# Allegro board HY_IP5328_TEST_V10A.brd
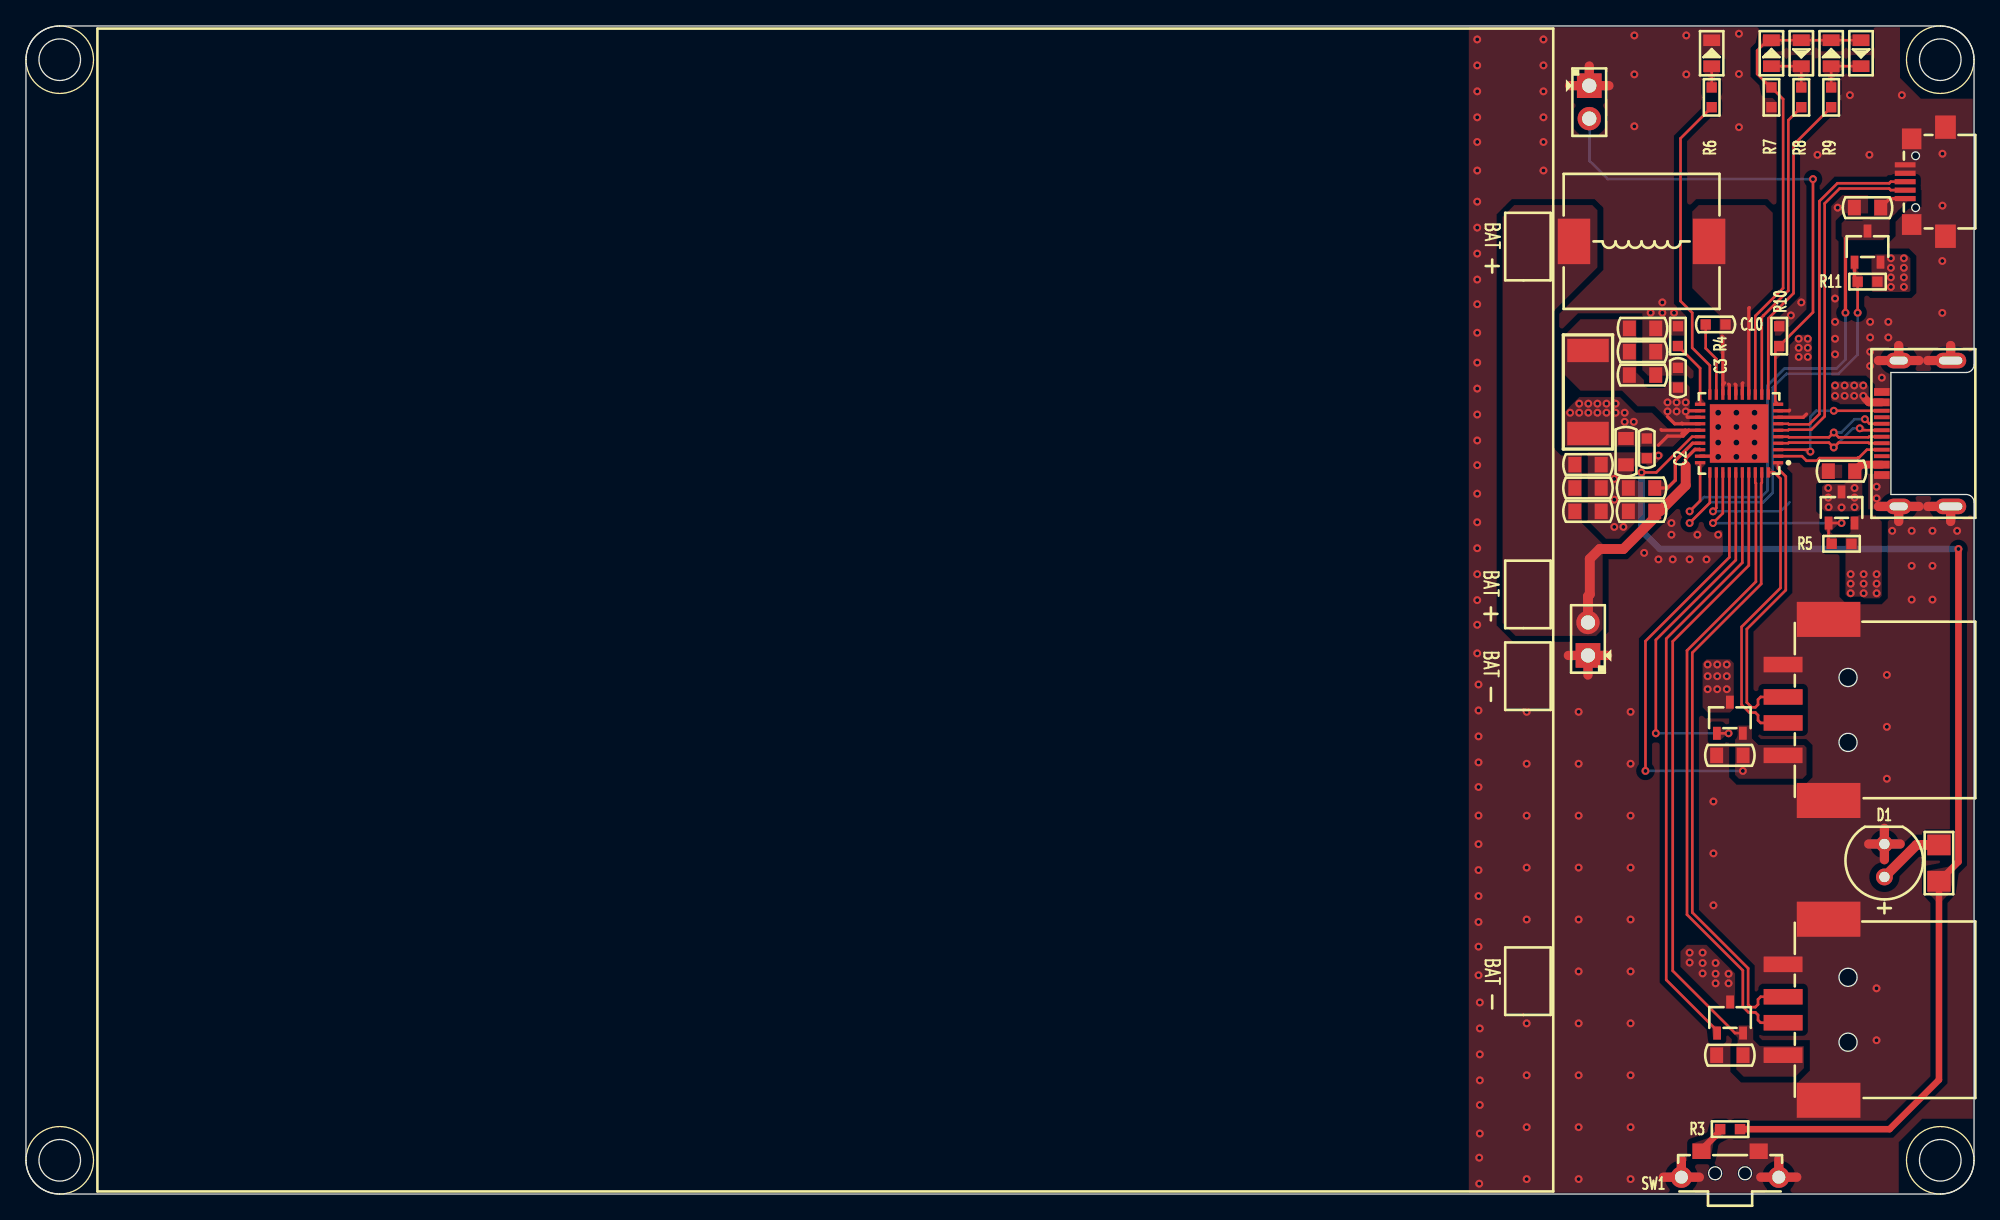
[diagram p0: board, top side]
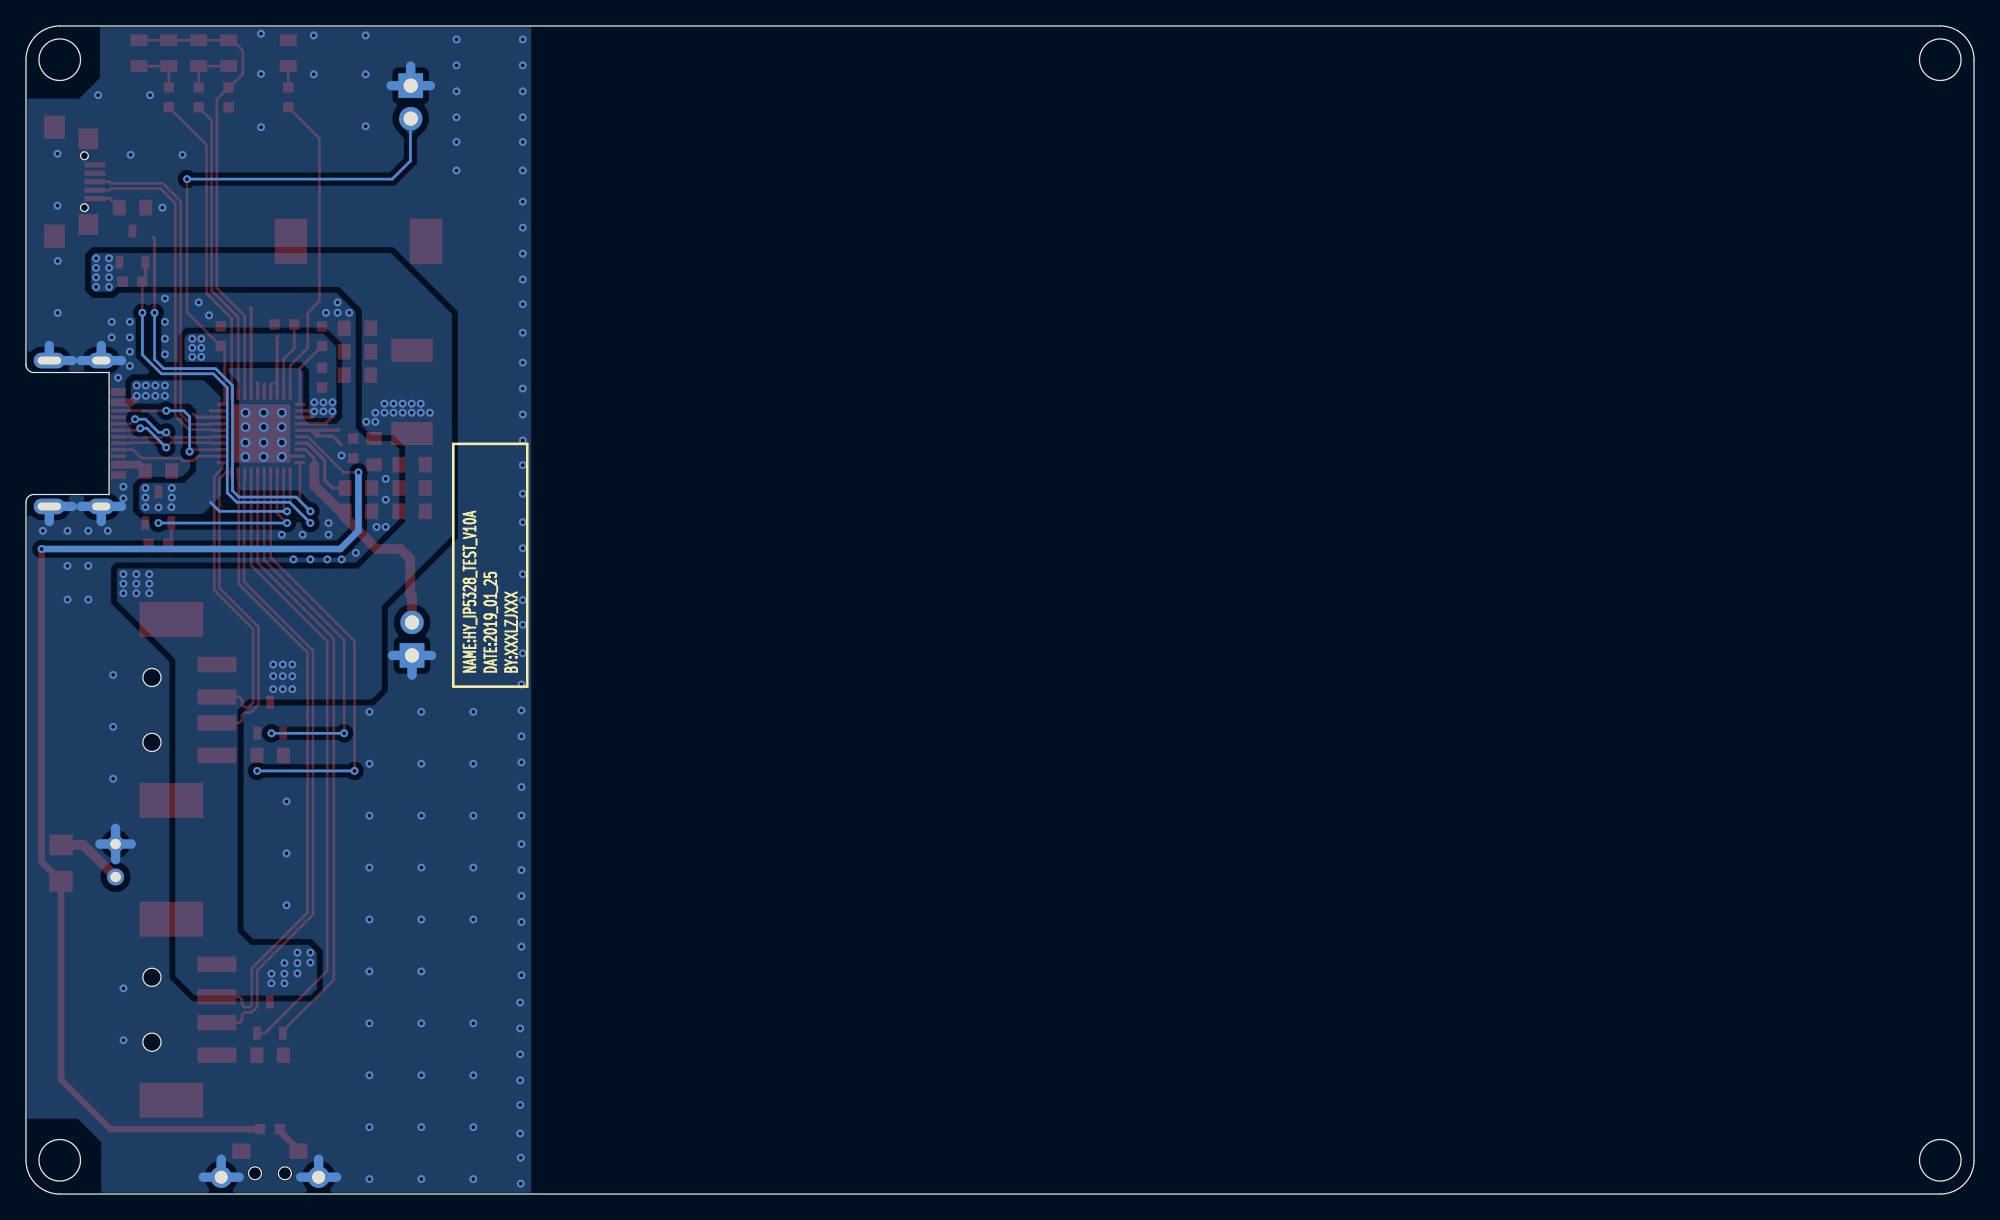
[diagram p1: board, bottom side, seen from below]

Outline 150 x 90 mm; copper layers: TOP, BOTTOM. Coordinates in mm from the lower left corner of the outline.
Outline path: circle c2.6,87.4 r1.6 ; circle c2.6,2.6 r1.6 ; circle c147.4,87.4 r1.6 ; circle c147.4,2.6 r1.6 ; 0,87.4 arc(0.76,89.24) 2.6,90 147.4,90 arc(149.24,89.24) 150,87.4 150,63.9 arc(149.82,63.48) 149.4,63.3 143.6,63.3 143.6,53.9 149.4,53.9 arc(149.82,53.72) 150,53.3 150,2.6 arc(149.24,0.76) 147.4,0 2.6,0 arc(0.76,0.76) 0,2.6 0,87.4

## Design rules (mm)
constraint set DEFAULT: min track width 0.203, pair gap 0.203
net group DP6: nets DMA1 DPA1
net group DP9: nets DMA2 DPA2
net group DP11: nets DMB DPB
net group DP12: nets DMC DPC

## Placement (name value [footprint] x y rotation side)
C1  22uF_25V  [C0805]  123.2 57.2 270 top
C2  0.1uF_25V  [C0603]  124.8 57.45 90 top
C3  0.1uF_25V  [C0603]  127.2 62.9 270 top
C4  22uF_25V  [C0805]  124.47 63.1 0 top
C5  22uF_25V  [C0805]  124.47 64.9 0 top
C6  22uF_25V  [C0805]  124.47 66.7 0 top
C7  22uF_25V  [C0805]  124.4 52.6 0 top
C8  22uF_25V  [C0805]  124.4 54.4 0 top
C9  10uF_25V  [C0805]  139.8 55.7 180 top
C10  0.1uF_25V  [C0603]  130.1 67 180 top
C11  22uF_25V  [C0805]  120.27 52.6 0 top
C12  22uF_25V  [C0805]  120.27 54.4 0 top
C13  22uF_25V  [C0805]  120.27 56.2 0 top
C14  10uF_25V  [C0805]  141.8 76 180 top
C15  10uF_25V  [C0805]  131.2 10.7 180 top
C16  10uF_25V  [C0805]  131.2 33.8 180 top
D1  LED_GREEN  [LED-5R0X5R0]  143.1 25.7 90 top
D2  LED_GREEN  [LED0805]  129.8 87.9 90 top
D3  LED_GREEN  [LED0805]  134.4 87.9 90 top
D4  LED_GREEN  [LED0805]  136.7 87.9 270 top
D5  LED_GREEN  [LED0805]  139 87.9 90 top
D6  LED_GREEN  [LED0805]  141.3 87.9 270 top
J1  -  [HEADER2X1-2R54-M]  120.27 41.5 90 top
J2  -  [HEADER2X1-2R54-M]  120.37 85.4 270 top
L1  SMMS1040-1R5M  [L10040]  124.4 73.4 180 top
NOREF  -  []  0 0 90 top
NOREF#2  -  []  0 0 0 top
Q1  AO3401A  [SOT23-3]  139.8 52.9 0 top
Q2  AO3401A  [SOT23-3]  141.8 73 0 top
Q3  AO3400A  [SOT23-3]  131.22 13.6 0 top
Q4  AO3400A  [SOT23-3]  131.2 36.7 0 top
R1  0R01  [R2512]  120.27 61.8 270 top
R2  20R  [R1206]  147.3 25.5 90 top
R3  1K  [R0603]  131.22 5 0 top
R4  110K  [R0603]  127.2 66.1 90 top
R5  10K  [R0603]  139.8 50.1 0 top
R6  10K  [R0603]  129.8 84.5 90 top
R7  0R/NI  [R0603]  134.4 84.5 270 top
R8  10K  [R0603]  136.7 84.5 90 top
R9  10K  [R0603]  139 84.5 90 top
R10  51K  [R0603]  135 66.1 90 top
R11  10K  [R0603]  141.8 70.3 0 top
SW1  K2-1112SW-A4SW-04/NI  [K2-1112SW-A4SW-04]  131.22 1.6 180 top
U1  IP5328P  [QFN40-6X6X0R5-4R6X4R6]  131.91 58.6 90 top
USB1  -  [USB-C_16P]  143 58.6 90 top
USB2  USB-MICRO  [USB-U-F-M5SS-W-1]  147.8 78 90 top
USB3  USB-A/NI  [USB-A-SMD]  136.2 14.2 0 top
USB4  USB-A/NI  [USB-A-SMD]  136.2 37.3 0 top

## Library data of the parts
C1 C4-C9 C11-C16 = CAP NP_3
C2 C3 C10 = CAP NP_2
D1-D6 = LED_2
J1 J2 = CON2
L1 = IND_BEAD_0805_600OHM_1
Q1 Q2 = MOS-P_0
Q3 Q4 = MOS-N
R1-R11 = R_Generic
SW1 = SWITCH-SPST-4P
U1 = IP5328P_0
USB1 = TYPE-C_16P
USB2 = USB-MICRO
USB3 USB4 = USB-A

## Footprints (pads in the part's own frame, mm; a bottom-side part is the same pattern mirrored in y, then rotated)
C0603
  rect 0.8x0.8 smd: 1(-0.762,0) 2(0.762,0)
C0805
  rect 1x1.2 smd: 1(-1.016,0) 2(1.016,0)
HEADER2X1-2R54-M
  rect 1.9x1.9 hole 1.1: 1(0,0)
  round 1.8 hole 1.1: 2(2.54,0)
K2-1112SW-A4SW-04
  round 1.65 hole 1: 1(-3.75,0.3) 4(3.75,0.3)
  rect 1.4x1.2 smd: 2(-2.2,-1.7) 3(2.2,-1.7)
L10040
  rect 2.5x3.5 smd: 1(-5.2,0) 2(5.2,0)
LED0805
  rect 0.9x1.3 smd: 1(-1,0) 2(1,0)
LED-5R0X5R0
  round 1.3 hole 0.8: 1(-1.27,0) 2(1.27,0)
QFN40-6X6X0R5-4R6X4R6
  rect 0.25x0.8 smd: 1(-2.25,-3) 2(-1.75,-3) 3(-1.25,-3) 4(-0.75,-3) 5(-0.25,-3) 6(0.25,-3) 7(0.75,-3) 8(1.25,-3) 9(1.75,-3) 10(2.25,-3) 21(2.25,3) 22(1.75,3) 23(1.25,3) 24(0.75,3) 25(0.25,3) 26(-0.25,3) 27(-0.75,3) 28(-1.25,3) 29(-1.75,3) 30(-2.25,3)
  rect 0.8x0.25 smd: 11(3,-2.25) 12(3,-1.75) 13(3,-1.25) 14(3,-0.75) 15(3,-0.25) 16(3,0.25) 17(3,0.75) 18(3,1.25) 19(3,1.75) 20(3,2.25) 31(-3,2.25) 32(-3,1.75) 33(-3,1.25) 34(-3,0.75) 35(-3,0.25) 36(-3,-0.25) 37(-3,-0.75) 38(-3,-1.25) 39(-3,-1.75) 40(-3,-2.25)
  rect 4.5x4.5 smd: 41(0,0)
R0603
  rect 0.8x0.8 smd: 1(-0.762,0) 2(0.762,0)
R1206
  rect 1.6x1.8 smd: 1(-1.4,0) 2(1.4,0)
R2512
  rect 1.8x3.2 smd: 1(-3.2,0) 2(3.2,0)
SOT23-3
  rect 0.6x1 smd: 1(-1,-1.2) 2(1,-1.2) 3(0,1.2)
USB-A-SMD
  rect 3x1.2 smd: 1(-0.9,-3.5) 2(-0.9,-1) 3(-0.9,1) 4(-0.9,3.5)
  rect 4.9x2.7 smd: 5(2.6,-6.975) 6(2.6,6.975)
USB-C_16P
  rect 0.6x1.2 smd: 1(-3.2,0.1) 2(-2.4,0.1) 11(2.4,0.1) 12(3.2,0.1)
  rect 0.3x1.2 smd: 3(-1.75,0.1) 4(-1.25,0.1) 5(-0.75,0.1) 6(-0.25,0.1) 7(0.25,0.1) 8(0.75,0.1) 9(1.25,0.1) 10(1.75,0.1)
  oval 1.2x2 hole 0.6x1.4: 13(-5.62,-1.2) 14(5.62,-1.2)
  oval 1.2x2.4 hole 0.6x1.8: 15(-5.62,-5.2) 16(5.62,-5.2)
USB-U-F-M5SS-W-1
  rect 0.4x1.6 smd: 1(-1.3,3.1) 2(-0.65,3.1) 3(0,3.1) 4(0.65,3.1) 5(1.3,3.1)
  rect 1.6x1.5 smd: 6(-3.3,2.6) 7(3.3,2.6)
  rect 1.8x1.6 smd: 8(-4.2,0) 9(4.2,0)

## Nets
GND: C1.2 C2.1 C3.1 C4.2 C5.2 C6.2 C7.1 C8.1 C9.2 C11.2 C12.2 C13.2 C14.2 C15.2 C16.2 D1.2(CATHODE) D2.2(CATHODE) J1.1 J2.1 R4.2 R7.2 R10.2 SW1.1 SW1.2 SW1.4 U1.29 U1.41 USB1.1 USB1.12 USB1.13 USB1.14 USB1.15 USB1.16 USB2.4 USB2.5 USB2.6 USB2.7 USB2.8 USB2.9 USB3.4 USB3.5 USB3.6 USB4.4 USB4.5 USB4.6
VBUSG: Q1.1 R5.1 U1.33
VCC_VBAT: C7.2 C11.1 C12.1 C13.1 J1.2 L1.2(B) U1.28
VCC_VBUS: C9.1 Q1.3 U1.32 USB1.2 USB1.11(VBUS2)
VCC_VIN: C14.1 Q2.3 U1.30 USB2.1(VBUS)
VCC_VMID: C1.1 C2.2 Q1.2(S) Q2.2(S) Q3.3 Q4.3 R1.2 R5.2 R11.2 U1.25
VCC_VOUT1: C15.1 Q3.2(S) U1.37 USB3.1(VBUS)
VCC_VOUT2: C16.1 Q4.2(S) U1.34 USB4.1(VBUS)
VCC_VREG: C8.2 U1.27
VCC_VSYS: C3.2 C4.1 C5.1 C6.1 R1.1 U1.8 U1.9 U1.22 U1.23(VSYS_4) U1.24
VING: Q2.1 R11.1 U1.31
CC1: U1.2 USB1.4
CC2: U1.3 USB1.10
DMA1: U1.38 USB3.2
DMA2: U1.40 USB4.2
DMB: U1.6 USB2.2
DMC: U1.4 USB1.5 USB1.7
DPA1: U1.39 USB3.3
DPA2: U1.1 USB4.3
DPB: U1.7 USB2.3
DPC: U1.5 USB1.6 USB1.8
KEY: R2.1 R3.2 U1.26
LIGHT: R6.1 U1.20
VOUT1G: Q3.1 U1.36
VOUT2G: Q4.1 U1.35
N17433042: R3.1 SW1.3
N17433133: R4.1 U1.21
N17433261: D2.1 R6.2
N17433329: C10.2 U1.19
N17433334: C10.1 L1.1 U1.14 U1.15 U1.16 U1.17 U1.18
N17433459: R8.1 U1.12
N17433474: R9.1 U1.11
N17433602: J2.2 R10.1 U1.10
N17436295: D3.2(CATHODE) D4.1 D5.2(CATHODE) D6.1 R7.1 U1.13
N17437693: D5.1 D6.2(CATHODE) R9.2
N17437706: D3.1 D4.2(CATHODE) R8.2
N17438061: D1.1 R2.2

Pads without a net: USB1 3 9

## Via types
v1: diameter 0.61, hole 0.305, TOP to BOTTOM, 242 vias
v2: diameter 0.762, hole 0.457, TOP to BOTTOM, 12 vias

## Routing (per net, layer and track width the routed paths; a pad name or vN(x,y) marks a point on that pad's centre or on a via; arc(x,y) is an arc through that point)
GND: length 76.9
  TOP w0.254: U1.29 130.16,56.85 U1.41
  TOP w0.711: 142.64,52.98 USB1.13 ; USB1.13 145.76,52.98 ; USB1.13 144.2,51.82 ; 133.58,1.3 SW1.1 ; SW1.1 136.35,1.3 ; SW1.1 134.97,2.68 ; J1.1 121.78,41.5 ; J1.1 120.27,39.99 ; J1.1 118.77,41.5 ; 141.89,26.97 D1.2 ; D1.2 143.1,25.76 ; D1.2 144.31,26.97 ; D1.2 143.1,28.18 ; 126.08,1.3 SW1.4 ; SW1.4 128.85,1.3 ; SW1.4 127.47,2.68 ; 148.2,51.82 USB1.15 146.44,52.98 ; J2.1 121.88,85.4 ; J2.1 118.86,85.4 ; J2.1 120.37,86.91 ; 142.64,64.22 USB1.14 ; USB1.14 145.76,64.22 ; USB1.14 144.2,65.38 ; 146.44,64.22 USB1.16 148.2,65.38
  BOTTOM w0.711: 146.44,52.98 USB1.15 148.2,51.82 ; J2.1 120.37,86.91 ; J2.1 121.88,85.4 ; J2.1 118.86,85.4 ; SW1.1 136.35,1.3 ; SW1.1 134.97,2.68 ; SW1.1 133.58,1.3 ; 143.1,25.76 D1.2 ; D1.2 143.1,28.18 ; D1.2 144.31,26.97 ; D1.2 141.89,26.97 ; SW1.4 127.47,2.68 ; SW1.4 128.85,1.3 ; SW1.4 126.08,1.3 ; USB1.14 145.76,64.22 ; USB1.14 142.64,64.22 ; USB1.14 144.2,65.38 ; USB1.13 145.76,52.98 ; USB1.13 144.2,51.82 ; USB1.13 142.64,52.98 ; 118.77,41.5 J1.1 ; J1.1 120.27,39.99 ; J1.1 121.78,41.5 ; 146.44,64.22 USB1.16 148.2,65.38
  vias: v1(111.75,88.96) v1(111.75,86.96) v1(111.75,84.96) v1(111.75,82.96) v1(111.75,81.06) v1(111.75,78.86) v1(111.75,76.46) v1(111.75,74.46) v1(111.75,72.46) v1(111.75,70.46) v1(111.75,68.56) v1(111.75,66.36) v1(111.75,64.06) v1(111.75,62.06) v1(111.75,60.06) v1(111.75,58.06) v1(111.75,56.16) v1(111.75,53.96) v1(111.75,51.76) v1(111.75,49.76) v1(111.75,47.76) v1(111.75,45.76) v1(111.75,43.86) v1(111.75,41.66) v1(111.85,39.26) v1(111.85,37.26) v1(111.85,35.26) v1(111.85,33.26) v1(111.85,31.36) v1(111.85,29.16) v1(111.85,26.96) v1(111.85,24.96) v1(111.85,22.96) v1(111.85,20.96) v1(111.85,19.06) v1(111.85,16.86) v1(111.95,14.76) v1(111.95,12.76) v1(111.95,10.76) v1(111.95,8.76) v1(111.95,6.86) v1(111.95,4.66) v1(111.9,2.8) v1(111.9,0.8) v1(115.55,37.15) v1(115.55,33.15) v1(115.55,29.15) v1(115.55,25.15) v1(115.55,21.15) v1(115.55,13.15) v1(115.55,9.15) v1(115.55,5.15) v1(115.55,1.15) v1(116.85,88.96) v1(116.85,86.96) v1(116.85,84.96) v1(116.85,82.96) v1(116.85,81.06) v1(116.85,78.86) v1(119.55,37.15) v1(119.55,33.15) v1(119.55,29.15) v1(119.55,25.15) v1(119.55,21.15) v1(119.55,17.15) v1(119.55,13.15) v1(119.55,9.15) v1(119.55,5.15) v1(119.55,1.15) v1(122.3,55.1) v1(122.3,53.5) v1(122.3,51.4) v1(123,51.4) v1(123.55,37.15) v1(123.55,33.15) v1(123.55,29.15) v1(123.55,25.15) v1(123.55,21.15) v1(123.55,17.15) v1(123.55,13.15) v1(123.55,9.15) v1(123.55,5.15) v1(123.55,1.15) v1(123.84,89.27) v1(123.84,86.27) v1(123.84,82.27) v1(124.6,49.4) v1(125.1,67.9) v1(125.7,56.9) v1(125.7,48.9) v1(126,68.7) v1(126,67.9) v1(126.7,51.7) v1(126.7,50.8) v1(126.8,48.9) v1(126.9,67.9) v1(127.84,89.27) v1(127.84,86.27) v1(128.1,48.9) v1(128.7,50.8) v1(129.4,48.9) v1(129.93,30.25) v1(129.93,26.25) v1(129.93,22.25) v1(130.3,50.8) v1(131.9,89.4) v1(131.9,86.3) v1(131.9,82.2) v1(135.9,67.7) v1(136.7,68.7) v1(137.94,80.07) v1(139.3,69) v1(139.3,67.2) v1(139.3,65.9) v1(139.3,64.7) v1(139.5,76) v1(140.44,84.67) v1(141.94,80.07) v1(142,67.2) v1(142,66) v1(142,64.9) v1(142,63.8) v1(142.5,54.5) v1(142.5,53.6) v1(142.49,15.85) v1(142.49,11.85) v1(142.9,62.9) v1(143.29,40) v1(143.29,36) v1(143.29,32) v1(143.4,67.2) v1(143.4,66) v1(143.7,51.1) v1(144.44,84.67) v1(145.2,51.1) v1(145.2,48.4) v1(145.2,45.8) v1(146.8,51.1) v1(146.8,48.4) v1(146.8,45.8) v1(147.57,80.16) v1(147.57,76.16) v1(147.56,71.89) v1(147.56,67.89) v1(148.7,51.1) v2(130.3,60.2) v2(130.3,59.1) v2(130.3,57.9) v2(130.3,56.8) v2(131.7,60.2) v2(131.7,59.1) v2(131.7,57.9) v2(131.7,56.8) v2(133.1,60.2) v2(133.1,59.1) v2(133.1,57.9) v2(133.1,56.8)
VBUSG: length 16.8
  TOP w0.203: R5.1 138.8,50.34 Q1.1 v1(139.8,51.7) ; U1.33 130.66,52.46 v1(129.9,51.7)
  BOTTOM w0.203: v1(129.9,51.7) v1(139.8,51.7)
VCC_VBAT: length 18.5
  TOP w0.254: 127.8,56.1 127.8,56.66 128.52,57.38 128.88,57.38 U1.28
  TOP w0.762: J1.2 120.27,46.06 120.41,46.2 120.41,48.94 121.18,49.7 123,49.7 125.42,52.12 C7.2 125.8,52.6 127.8,54.6 127.8,56.1
VCC_VBUS: length 13
  TOP w0.203: U1.32 130.16,52.86 v1(129.9,52.6)
  TOP w0.6: C9.1 141.32,56.2 USB1.2 ; USB1.11 141.9,61 141.6,61.3
  BOTTOM w0.203: 135.8,53.3 135.1,52.6 v1(129.9,52.6)
  vias: v1(138.77,54.4) v1(138.77,53.66) v1(138.8,52.93) v1(139.3,62.3) v1(139.3,61.5) v1(139.8,52.9) v1(140.04,62.3) v1(140.04,61.5) v1(140.77,62.3) v1(140.77,61.5) v1(140.8,54.4) v1(140.8,53.66) v1(140.8,52.93) v1(141.47,62.3) v1(141.47,61.5)
VCC_VIN: length 37.3
  TOP w0.203: U1.30 128.91,53.41 v1(128.1,52.6)
  TOP w0.254: v1(140.1,67.9) 140.1,73.6 140.2,73.7 ; C14.1 143.52,76.7 USB2.1
  BOTTOM w0.203: v1(128.1,52.6) 129.2,53.7 133.6,53.7 134.1,54.2 134.1,62.3 135.4,63.6 139.4,63.6 140.1,64.3 v1(140.1,67.9)
VCC_VMID: length 6.2
  TOP w0.254: 128.05,58.85 127.75,58.85 ; 128.05,58.85 127.6,58.4 126.4,58.4 125.7,57.7 ; 128.05,58.85 U1.25 ; 127.75,58.85 127.5,58.6 ; 127.75,58.85 125.95,58.85 125.9,58.9
  vias: v1(118.9,60.2) v1(119.6,60.9) v1(119.6,60.2) v1(120.3,60.9) v1(120.3,60.2) v1(121,60.9) v1(121,60.2) v1(121.7,60.9) v1(121.7,60.2) v1(122.4,60.9) v1(122.4,60.2) v1(123.1,60.2) v1(123.1,59.5) v1(123.8,59.5) v1(128.1,18.6) v1(128.1,17.84) v1(129.1,18.6) v1(129.1,17.8) v1(129.1,17) v1(129.49,40.8) v1(129.49,39.9) v1(129.49,38.9) v1(130.1,17.8) v1(130.1,16.97) v1(130.1,16.24) v1(130.23,40.8) v1(130.23,39.9) v1(130.23,38.9) v1(130.96,40.8) v1(130.96,39.9) v1(130.96,38.9) v1(131.1,16.97) v1(131.1,16.24) v1(140.5,47.76) v1(140.5,47.03) v1(140.5,46.29) v1(141.5,47.76) v1(141.5,47.03) v1(141.5,46.29) v1(142.5,47.76) v1(142.5,47.03) v1(142.5,46.29) v1(143.6,72.1) v1(143.6,71.36) v1(143.6,70.63) v1(143.6,69.89) v1(144.6,72.1) v1(144.6,71.36) v1(144.6,70.63) v1(144.6,69.89)
VCC_VOUT1: length 48.2
  TOP w0.203: Q3.2 131.6,12.4 126.8,17.2 126.8,42.58 132.66,48.44 U1.37
VCC_VOUT2: length 33.2
  TOP w0.203: U1.34 131.16,49.06 124.7,42.6 v1(124.7,32.6)
  BOTTOM w0.203: v1(132.2,32.6) v1(124.7,32.6)
VCC_VREG: length 5.8
  TOP w0.254: C8.2 126.4,54.4 127,55 127,56.52 128.33,57.85 U1.27
VCC_VSYS: length 8.1
  TOP w0.254: U1.24 127.55,59.35 ; 127.55,59.35 127.5,59.4 ; 127.55,59.35 126.95,59.35 126.4,59.9 ; 137.1,60.1 136.85,59.85 U1.8 ; U1.23 127.95,59.85 127.9,59.9 ; U1.22 127.95,60.35 127.9,60.3 ; 135.8,60.4 135.75,60.35 U1.9
  vias: v1(126.4,61) v1(126.4,60.3) v1(127.1,61) v1(127.1,60.3) v1(127.8,61) v1(127.8,60.3) v1(136.5,65.9) v1(136.5,65.2) v1(136.5,64.5) v1(137.2,65.9) v1(137.2,65.2) v1(137.2,64.5)
VING: length 34.8
  TOP w0.203: U1.31 129.66,53.26 v1(128.1,51.7) ; R11.1 v1(141.04,67.9)
  TOP w0.254: Q2.1 140.8,70.54 R11.1
  BOTTOM w0.203: v1(128.1,51.7) 129.7,53.3 133.77,53.3 134.5,54.03 134.5,62.13 135.57,63.2 139.57,63.2 141.04,64.67 v1(141.04,67.9)
CC1: length 8.5
  TOP w0.203: U1.2 136.75,56.85 137.1,56.5 137.9,56.5 138.1,56.7 141.03,56.7 141.09,56.75 141.15,56.75 141.75,57.35 USB1.4
CC2: length 10.9
  TOP w0.203: U1.3 137.25,57.35 v1(137.4,57.2) ; USB1.10 v1(139.2,60.35)
  BOTTOM w0.203: v1(139.2,60.35) 137.85,60.35 137.4,59.9 v1(137.4,57.2)
DMA1: length 49
  TOP w0.203: USB3.2 133.57,13.2 133.37,13.4 133.37,13.79 133.16,14 132.63,14 132.2,14.43 132.2,17.23 127.9,21.53 127.9,41.87 133.2,47.18 133.2,54.77 133.16,54.81 U1.38
DMA2: length 23.8
  TOP w0.203: USB4.2 133.57,36.3 133.37,36.5 133.37,36.89 133.16,37.1 132.71,37.1 132.1,37.71 132.1,43.7 135.1,46.7 135.1,55.12 134.62,55.6 U1.40
DMB: length 27.2
  TOP w0.203: USB2.2 143.59,77.35 143.47,77.47 139.65,77.47 138.5,76.33 138.5,59.93 137.47,58.9 135.74,58.9 135.69,58.85 U1.6
DMC: length 12.7
  TOP w0.203: USB1.7 141.35,58.85 v1(141.2,59) ; U1.4 135.69,57.85 135.74,57.9 138.82,57.9 v1(139.2,57.52) 139.58,57.9 141.87,57.9 141.91,57.85 USB1.5
  BOTTOM w0.203: v1(139.2,57.52) 140.68,59 v1(141.2,59)
DPA1: length 48.3
  TOP w0.203: USB3.3 133.57,15.2 133.37,15 133.37,14.61 133.16,14.4 132.8,14.4 132.61,14.6 132.61,17.39 128.31,21.69 128.31,41.71 133.61,47.01 133.61,54.77 133.66,54.81 U1.39
DPA2: length 23.5
  TOP w0.203: U1.1 134.91,55.89 135.51,55.29 135.51,46.53 132.51,43.53 132.51,37.87 132.88,37.5 133.16,37.5 133.37,37.71 133.37,38.1 133.57,38.3 USB4.3
DPB: length 27.2
  TOP w0.203: U1.7 135.69,59.35 135.74,59.3 137.3,59.3 138.09,60.09 138.09,76.49 139.48,77.88 143.47,77.88 143.59,78 USB2.3
DPC: length 12.6
  TOP w0.203: U1.5 135.69,58.35 135.74,58.3 138.82,58.3 v1(139.2,58.68) 139.58,58.3 141.87,58.3 141.91,58.35 USB1.6 ; USB1.8 141.95,59.35 v1(141.6,59.7)
  BOTTOM w0.203: v1(139.2,58.68) 139.78,58.68 140.8,59.7 v1(141.6,59.7)
KEY: length 93.5
  TOP w0.203: v1(124.4,55.6) 125.54,55.6 128.29,58.35 U1.26
  TOP w0.5: R3.2 143.5,5 147.3,8.8 R2.1
  TOP w0.508: R2.1 148.8,25.6 v1(148.8,49.7)
  BOTTOM w0.508: v1(148.8,49.7) 125.8,49.7 124.4,51.1 v1(124.4,55.6)
LIGHT: length 24.1
  TOP w0.203: R6.1 127.4,81.34 127.4,68.8 128.3,67.9 128.3,65.2 129.66,63.84 U1.20
VOUT1G: length 47.2
  TOP w0.203: Q3.1 130.22,12.58 126.3,16.5 126.3,42.79 132.16,48.64 U1.36
VOUT2G: length 29.2
  TOP w0.203: U1.35 131.66,48.85 125.5,42.69 v1(125.5,35.5) ; Q4.1 v1(131.1,35.5)
  BOTTOM w0.203: v1(125.5,35.5) v1(131.1,35.5)
N17433042: length 2.3
  TOP w0.5: SW1.3 129.02,3.42 130.45,4.85 R3.1
N17433133: length 5.2
  TOP w0.203: R4.1 128.91,63.63 U1.21
N17433261: length 1.6
  TOP w0.203: R6.2 D2.1
N17433329: length 5.7
  TOP w0.203: U1.19 130.16,64.34 129.34,65.16 C10.2
N17433334: length 14
  TOP w0.254: 132.7,68.3 132.66,68.26 U1.14 ; 131.6,62.4 131.66,62.34 U1.16 ; U1.17 131.16,62.34 131.1,62.4 ; 130.66,62.36 130.66,66.04 130.6,66.1 ; 130.66,62.36 U1.18 ; 130.66,62.36 130.8,62.5 ; 132.2,62.5 132.16,62.46 U1.15
N17433459: length 23.4
  TOP w0.203: U1.12 133.66,67.56 133.8,67.7 133.8,67.71 135.7,69.6 135.7,82.74 R8.1
N17433474: length 24.1
  TOP w0.203: U1.11 134.16,67.46 136.1,69.4 136.1,80.84 R9.1
N17433602: length 39.7
  TOP w0.203: v1(137.6,78.2) 137.6,67.94 R10.1 135,65.3 134.7,65 134.7,61.06 U1.10
  BOTTOM w0.203: J2.2 120.4,82.83 120.4,79.6 121.8,78.2 v1(137.6,78.2)
N17436295: length 36.6
  TOP w0.203: U1.13 133.16,67.66 135.3,69.8 135.3,84.36 R7.1 134.34,85.26 133.3,86.3 133.3,88.1 134.1,88.9 D3.2 D4.1 D5.2 D6.1
N17437693: length 3.9
  TOP w0.203: D6.2 D5.1 R9.2
N17437706: length 3.9
  TOP w0.203: D3.1 D4.2 R8.2
N17438061: length 5.2
  TOP w0.762: D1.1 145.57,26.9 R2.2

## Copper pours and planes (outline as drawn; the poured copper is in the pictures)
GND on TOP: 144.3,89.9 144.3,86 145.9,84.4 149.9,84.4 149.9,63.4 143.5,63.4 143.5,53.8 149.9,53.8 149.9,5.8 146,5.8 144.2,4 144.2,0.1 111.1,0.1 111.1,89.9 ; 9 cut-outs
GND on BOTTOM: 144.3,89.9 144.3,86 145.9,84.4 149.9,84.4 149.9,63.4 143.5,63.4 143.5,53.8 149.9,53.8 149.9,5.8 146,5.8 144.2,4 144.2,0.1 111.1,0.1 111.1,89.9
VCC_VBAT on TOP: 120.6,76.2 114.6,76.2 113.7,75.3 113.7,44 114.7,43 120.9,43 121.4,43.5 121.4,50.1 119.8,51.7 119.8,56.9 118.2,56.9 117.6,57.5 117.6,68 121,71.4 121,75.8
VCC_VBUS on TOP: 141.9,60.7 139.3,60.7 139,61 139,62.4 139.2,62.6 141.5,62.6 141.9,62.2
VCC_VBUS on TOP: 140.3,56.3 141.3,56.3 141.4,56.4 141.4,52.9 141.1,52.6 138.5,52.6 138.3,52.8 138.3,54.5 138.5,54.7 140,54.7 140.3,55
VCC_VBUS on BOTTOM: 141.6,60.9 137.4,60.9 136.9,60.4 136.9,55.7 137.8,54.8 141,54.8 141.3,54.5 141.3,52.8 140.9,52.4 136.4,52.4 135,53.8 135,61.4 136.3,62.7 141.7,62.7 141.9,62.5 141.9,61.2
VCC_VIN on TOP: 143.6,76.9 145.5,76.9 145.5,76.5 144.9,76.5 143.5,75.1 143.5,74 143,73.5 140.1,73.5 139.8,73.8 139.8,74.8 140.1,75.1 142,75.1 142.3,75.4 142.3,76.7 143.4,76.7
VCC_VMID on TOP: 131.5,37.4 131.5,40.9 131.2,41.2 129.4,41.2 129.1,40.9 129.1,37.5 129.5,37.1 131.2,37.1
VCC_VMID on TOP: 118.6,57.6 126.9,57.6 127.6,58.3 127.9,58.3 128.2,58.6 128.2,59 126.4,59 125.2,60.2 124,60.2 122.8,61.4 119.6,61.4 118.5,60.3 118.5,57.7
VCC_VMID on TOP: 140.5,52.3 142.4,52.3 142.9,51.8 142.9,46.1 142.7,45.9 140.4,45.9 140.1,46.2 140.1,50.6 140.5,51
VCC_VMID on TOP: 131.6,14.3 131.6,17 129.4,19.2 127.9,19.2 127.4,18.7 127.4,17.5 130.6,14.3
VCC_VMID on TOP: 142.1,72.1 142.4,72.4 144.8,72.4 145.1,72.1 145.1,69.6 145,69.5 142.2,69.5 142.1,69.6
VCC_VMID on BOTTOM: 128.1,15.3 137,15.3 138.5,16.8 138.5,41.2 143,45.7 143,48.1 142.9,48.2 124.4,48.2 120.8,51.8 120.8,57.6 121.67,58.48 123.42,58.48 124.15,59.2 124.15,68.15 125.9,69.9 143,69.9 143.4,69.5 144.7,69.5 145,69.8 145,72.2 144.7,72.5 121.9,72.5 117.2,67.8 117.2,50.7 122.6,45.3 122.6,38.9 123.4,38.1 132.9,38.1 133.7,37.3 133.7,20.2 132.7,19.2 128.2,19.2 127.6,18.6 127.6,15.8
VCC_VOUT1 on TOP: 131.8,12.9 131.8,11.5 131.7,11.4 131.7,9.6 132.25,9.05 136.25,9.05 136.9,9.7 136.9,11.4 133.5,11.4 133,11.9 133,12.8 132.8,13 131.9,13
VCC_VOUT2 on TOP: 131.6,36.1 131.6,32.3 131.9,32 136.8,32 137.1,32.3 137.1,34.4 136.9,34.6 133.4,34.6 132.9,35.1 132.9,36.1
VCC_VSYS on TOP: 135.7,59.8 137.1,59.8 137.5,60.2 137.5,66 137.3,66.2 136.3,66.2 135.7,65.6
VCC_VSYS on TOP: 124,67.4 119.7,67.4 118.5,66.2 118.5,63.1 119.7,61.9 122.9,61.9 124.1,60.7 125.4,60.7 126.9,59.2 128.1,59.2 128.1,62.2 127.7,62.6 124.7,62.6 124,63.3
VCC_VSYS on BOTTOM: 128.2,60 128,59.8 126.3,59.8 126.1,60 126.1,65.3 127.1,66.3 137.5,66.3 137.8,66 137.8,64.3 137.6,64.1 128.8,64.1 128.2,63.5
N17433334 on TOP: 134.5,69.5 132.8,67.8 132.8,62.2 130.4,62.2 130.4,67.7 128.3,69.8 128.3,75.7 128.8,76.2 133.9,76.2 134.5,75.6

Small or netless copper shapes (teardrops, artwork), in the pictures only: 91 on TOP, 19 on BOTTOM

## Text on the board
Ref Des/Silkscreen Bottom: BY:XXXLZJXXX | DATE:2019_01_25 | NAME:HY_IP5328_TEST_V10A
Ref Des/Silkscreen Top: BAT
DEVICE_TYPE_TOP: FIGURE | FINISHED_SIZE | 0.3048 | 0.4572 | 0.8 | 1.0 | 1.1 | 1.4x0.6 | 1.8x0.6 | DRILL CHART: TOP to BOTTOM | ALL UNITS ARE IN MILLIMETERS | PLATED | QTY | 242 | 12 | 2 | 4 | 266 | TOTAL HOLES:
